# Altium PCB RAUCH_PCB.PcbDoc
Units mm, origin at the board's own origin, x right, y up, seen from the top; angles counter-clockwise.
Board outline 99.95 x 50.04 mm, 2 copper layers (Top Layer, Bottom Layer); 42 components, 26 nets, 91 pads, 10 vias.
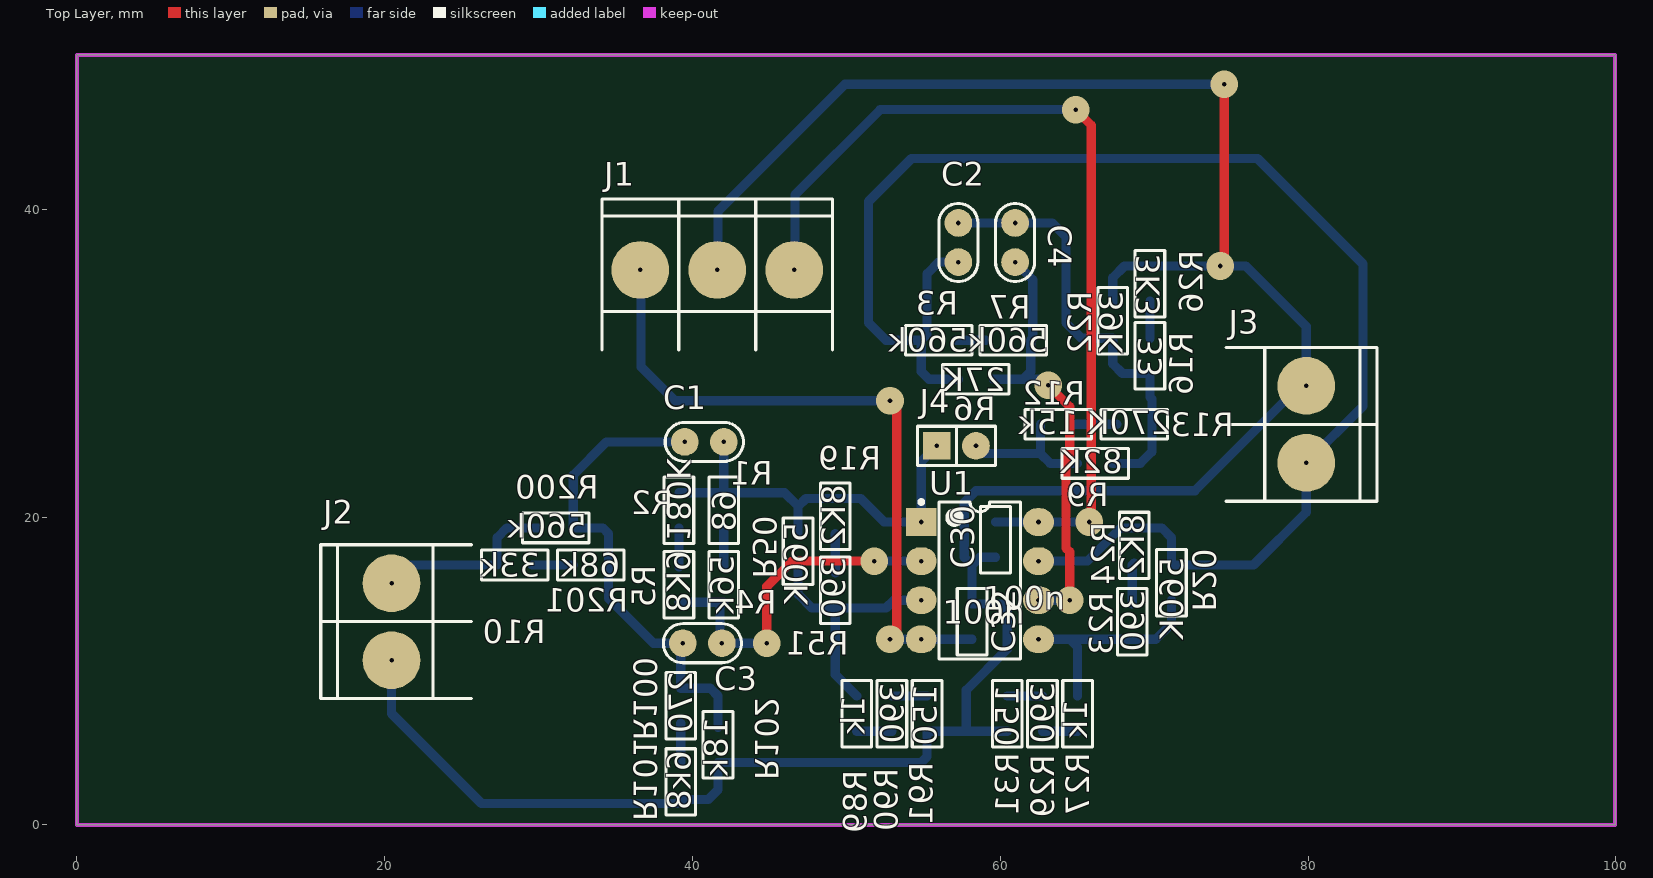
[diagram p0: Top Layer view]
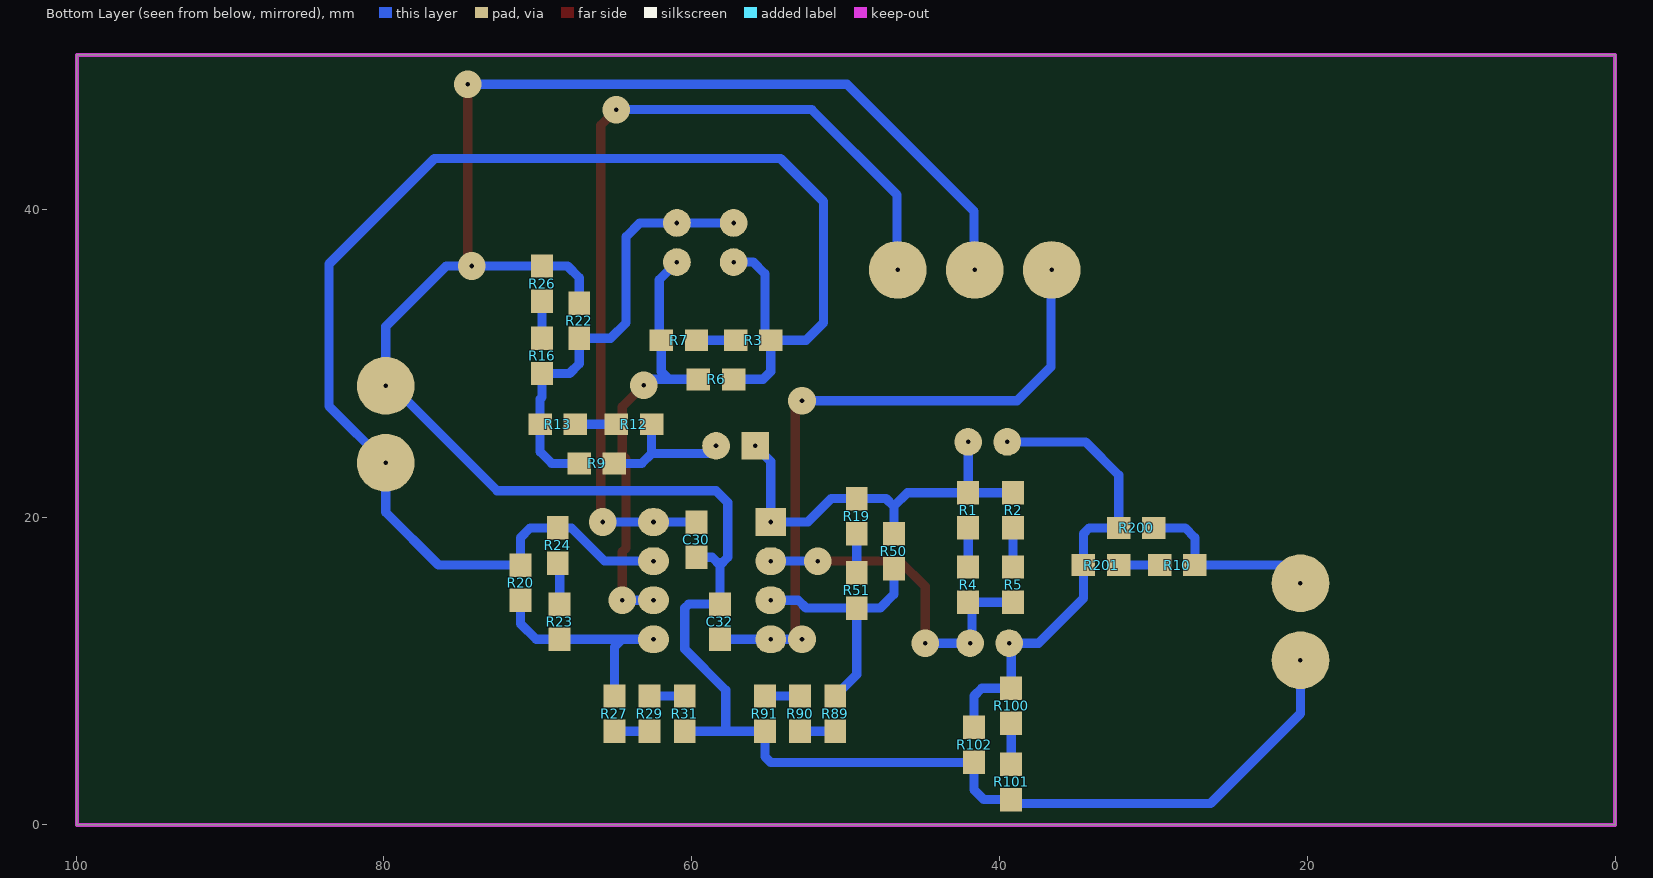
[diagram p1: Bottom Layer view, seen from below]
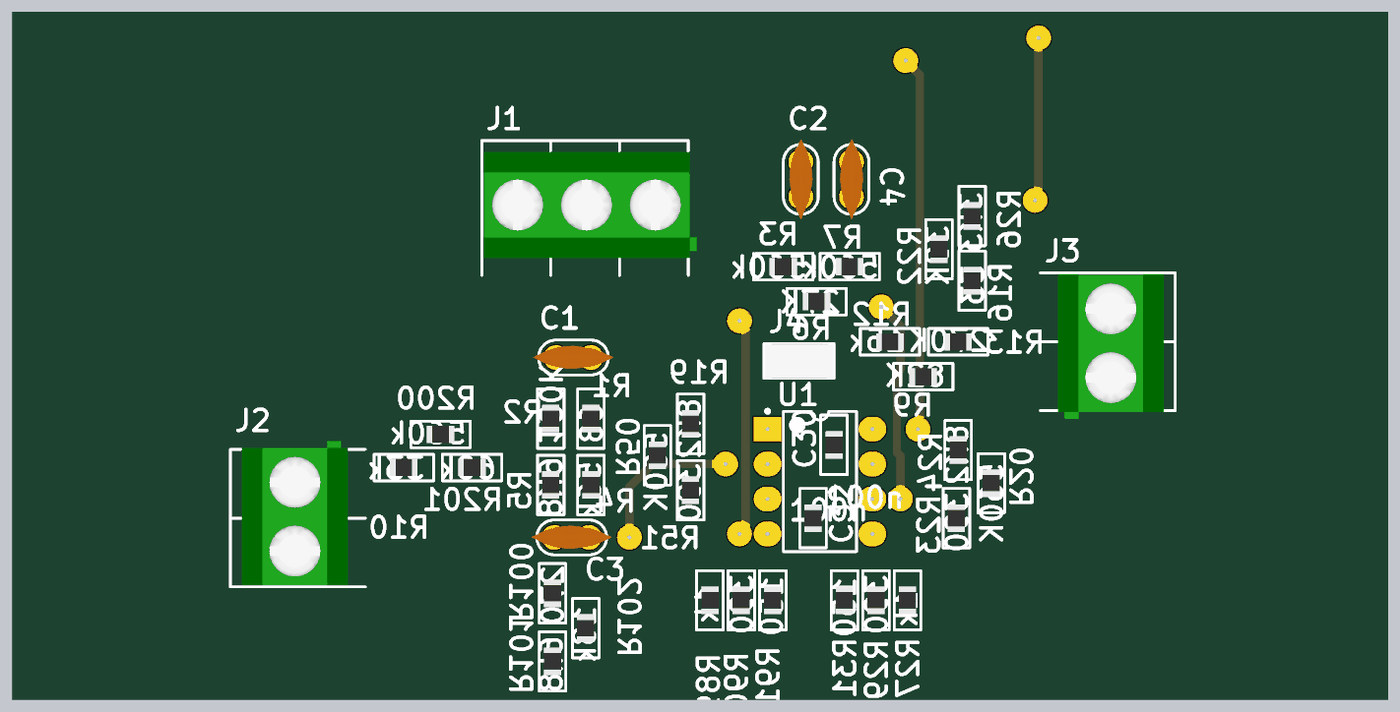
[diagram p2: 3D render of the assembled board from above, using the file's embedded part models]
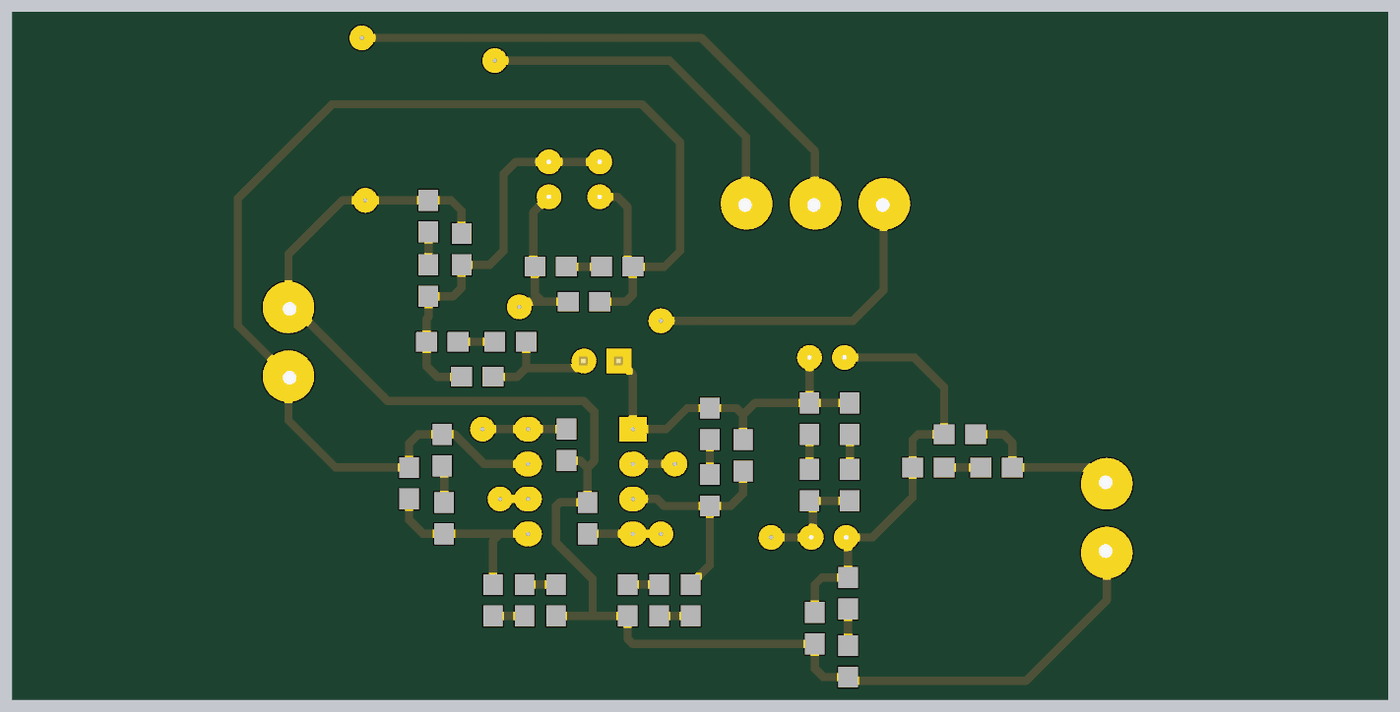
[diagram p3: 3D render of the assembled board from below, using the file's embedded part models]

## Layer stack, top to bottom
Top Solder: solder mask 0.0102, Solder Resist, Dk 3.5
Top Layer: signal copper 0.0356
Dielectric 1: dielectric 0.32, FR-4, Dk 4.8
Bottom Layer: signal copper 0.0356
Bottom Solder: solder mask 0.0102, Solder Resist, Dk 3.5

## Board outline
0,0 99.949,0 99.949,50.038 0,50.038

## Design rules (kind name [scope] priority, off if disabled: settings)
Clearance [All] p1: gap=0.254 ignorepadtopadclearanceinfootprint=FALSE except(0: Arc-Hole Track-Hole SMDPad-Hole THPad-Hole Via-Hole Fill-Hole Poly-Hole Region-Hole Text-Hole)
PolygonConnect [All] p1: connectstyle=Relief reliefconductorwidth=0.254 reliefentries=4 polygonreliefangle="90 Angle" airgapwidth=0.254
RoutingVias [All] p1: holewidth=0.711 width=1.27 viastyle="Through Hole" minholewidth=0.711 minwidth=1.27 maxholewidth=0.711 maxwidth=1.27
SolderMaskExpansion [All] p1: expansion=0.102
Width [All] p1: maxlimit=0.6 minlimit=0.6 preferedwidth=0.6
30 further rules are at their usual default settings.

## Components (designator, comment, footprint, x,y, rotation, side; value= is the part's Value field where it differs from the comment)
C1 "330p" CAP100 40.767,24.892 r0 top
C2 "470p" CAP100 57.277,37.846 r270 top
C3 "330p" CAP100 40.64,11.811 r0 top
C4 "470p" CAP100 60.96,37.846 r270 top
C30 "100n" 0805 59.69,18.542 r90 bottom
C32 "100n" 0805 58.166,13.208 r90 bottom
J1 "POWER" BORNERA3 41.609,36.068 r270 top
J2 "BORNERA 2" BORNERA2 20.447,13.208 r0 top
J3 "BORNERA 2" BORNERA2 79.883,26.035 r180 top
J4 "JUMPER" JUMPER2 57.15,24.638 r0 top
R1 "68" 0805 42.037,20.447 r90 bottom
R2 "180K" 0805 39.116,20.447 r90 bottom
R3 "560k" 0805 56.007,31.496 r0 bottom
R4 "56k" 0805 42.037,15.621 r90 bottom
R5 "6K8" 0805 39.116,15.621 r90 bottom
R6 "27K" 0805 58.42,28.956 r0 bottom
R7 "560k" 0805 60.833,31.496 r0 bottom
R9 "82K" 0805 66.167,23.495 r180 bottom
R10 "33k" 0805 28.448,16.891 r0 bottom
R12 "15k" 0805 63.754,26.035 r180 bottom
R13 "270K" 0805 68.707,26.035 r180 bottom
R16 "33" 0805 69.723,30.48 r90 bottom
R19 "8K2" 0805 49.276,20.066 r270 bottom
R20 "560K" 0805 71.12,15.748 r270 bottom
R22 "39K" 0805 67.31,32.766 r90 bottom
R23 "390" 0805 68.58,13.208 r270 bottom
R24 "8K2" 0805 68.707,18.161 r270 bottom
R26 "3K3" 0805 69.723,35.179 r90 bottom
R27 "1k" 0805 65.024,7.239 r90 bottom
R29 "390" 0805 62.738,7.239 r270 bottom
R31 "150" 0805 60.452,7.239 r90 bottom
R50 "560K" 0805 46.863,17.78 r270 bottom
R51 "390" 0805 49.276,15.24 r270 bottom
R89 "1k" 0805 50.673,7.239 r90 bottom
R90 "390" 0805 52.959,7.239 r270 bottom
R91 "150" 0805 55.245,7.239 r90 bottom
R100 "270" 0805 39.243,7.747 r90 bottom
R101 "6k8" 0805 39.243,2.794 r90 bottom
R102 "18k" 0805 41.656,5.207 r90 bottom
R200 "560k" 0805 31.115,19.304 r0 bottom
R201 "68k" 0805 33.401,16.891 r0 bottom
U1 "TL082ACPE4" TI-P8 58.674,15.875 r0 top locked

## Footprints (in the part's own frame and the unit in brackets; to place one, negate y for a bottom-side part, rotate by r counter-clockwise, add the part's x,y. Pads: shape width x height; smd on the part's side, far side on the other; paste and mask are expansions set on the pad)
0805 [mil] "Pasivo 0805"
  rect 60x56 smd: 1(-45,0) 2(45,0)
  body extent -40,-25 39,24, height 15
BORNERA2 [mm] "Bornera con Tornillos 5mm separación"
  round 3.75 hole 0.3: 1(0,2.5) 2(0,-2.5)
  silkscreen extent -4.6,-5 5.2,5, body extent -3.76,-4.89 3.94,5.61, height 10
BORNERA3 [mm] "Bornera con Tornillos 5mm separación"
  round 3.75 hole 0.3: 1(0,5) 2(0,0) 3(0,-5)
  silkscreen extent -4.6,-7.5 5.2,7.5, body extent -3.76,-7.39 3.94,8.11, height 10.05
CAP100 [mm]
  round 1.8 hole 0.3 unplated: 1(-1.27,0) 2(1.27,0)
  silkscreen extent -2.54,-1.27 2.54,1.27, body extent -2.92,-0.84 2.92,0.86, height 6.12
JUMPER2 [mm]
  rect 1.8x1.8 hole 0.3: 1(-1.27,0)
  round 1.8 hole 0.3: 2(1.27,0)
  silkscreen extent -2.54,-1.27 2.54,1.27, body extent -2.46,-1.27 2.54,1.27, height 9.5
TI-P8 [mm] "DIP, 8-Leads, Body 9.59x6.35mm, Pitch 2.54mm"
  rect 2x1.8 hole 0.3: 1(-3.81,3.81)
  oval 2x1.8 hole 0.3: 2(-3.81,1.27) 3(-3.81,-1.27) 4(-3.81,-3.81) 5(3.81,-3.81) 6(3.81,-1.27) 7(3.81,1.27) 8(3.81,3.81)
  silkscreen extent -3.93,-5.1 2.65,5.23, body extent -3.95,-5.07 3.95,5.07, height 5.08

## Part data
C1 C2 C3 C4 C30 C32: library part CAP
J1: library part "BORNERA 3"
R1 R2 R3 R4 R5 R6 R7 R9 R10 R12 R13 R16 R19 R20 R22 R23 R24 R26 R27 R29 R31 R50 R51 R89 R90 R91 R100 R101 R102 R200 R201: library part RES
U1: "JFET-Input Operational Amplifier, 7 to 36 V, 0 to 70 degC, 8-pin DIP (P8), Pb-Free (RoHS)", Manufacturer="Texas Instruments", Rating=Catalog, Supplier Part Number 1=TL082ACPE4-ND, Total Supply Voltage(Max)(+5V is 5, +/-5V is 10)=36, Total Supply Voltage(Min)(+5V is 5, +/-5V is 10)=7, CMRR(Min)(dB)=75, Code_JEDEC=MS-001, ComponentLink1Description="Manufacturer URL", ComponentLink1URL=http://www.ti.com/, ComponentLink2Description=Datasheet, ComponentLink2URL=http://www.ti.com/lit/ds/symlink/tl082a.pdf, ComponentLink3Description="Package Specification", ComponentLink3URL=http://www.ti.com/litv/pdf/mpdi001b, DatasheetVersion=SLOS081G, Eco-Plan="Pb-Free (RoHS)", GBW(Typ)(MHz)=3, IIB(Max)(pA)=200, Iq per channel(Max)(mA)=2.8, Mounting Technology="Through Hole", Number of Channels=2, Offset Drift(Typ)(uV/C)=18, PackageDescription="8-Pin Plastic In-Line, Body 9.59 x 6.35 mm, Pitch 2.54 mm", PackageReference=P8, PackageVersion="4040082/E, 04/2010", PartNumber=TL082ACPE4, Slew Rate(Typ)(V/us)=13, Sub Family="General Purpose Amplifier, High Supply Voltage Amplifier (>=30V)", Supplier 1=Digi-Key, Supplier 2=Newark, Supplier 3=Mouser, Supplier Part Number 2=37K4392, Supplier Part Number 3=595-TL082ACPE4, Vio (25C)(Max)(mV)=6, Vn at 1kHz(Typ)(nV/rtHz)=18

## Via types
v1: diameter 1.8, hole 0.3, Top Layer to Bottom Layer, 10 vias

## Nets (pads, with @x,y where several pads share a name; then routed paths per layer and width w, separated by ;. In a path a pad name is that pad's centre, name@x,y a point inside that pad or via, vN(x,y) a via of type N, cw(c..) or ccw(c..) an arc to the next point about the centre after c; other vN are vias at no path point)
+VCC: C30.2 J1.1 U1.8 | length 57.8
  Top Layer w0.6: v1(64.897,46.482) 65.913,45.466 v1@65.913,19.685
  Bottom Layer w0.6: J1.1@46.656,36.957 46.656,40.941 52.197,46.482 v1(64.897,46.482) ; C30.2 U1.8 v1(65.786,19.685)
-VCC: C32.1 J1.3 U1.4 | length 45.5
  Top Layer w0.6: v1(52.832,12.065) 53.27,12.503 53.27,27.121 v1(52.832,27.559)
  Bottom Layer w0.6: J1.3@36.656,36.957 36.656,29.765 38.862,27.559 v1(52.832,27.559) ; v1(52.832,12.065) U1.4 C32.1
GND: C30.1 C32.2 J1.2 J2.2 J3.2 R22.2 R26.2 R31.1 R91.1 R101.1 R102.1 | length 166.4
  Top Layer w0.6: v1(74.295,36.322) 74.549,36.576 v1(74.549,48.133)
  Bottom Layer w0.6: J2.2 20.447,7.239 26.289,1.397 38.989,1.397 R101.1 41.021,1.651 41.656,2.286 R102.1 54.864,4.064 55.245,4.445 R91.1 57.785,6.096 ; J1.2@41.656,36.957 41.656,39.878 49.911,48.133 v1(74.549,48.133) ; C30.1 58.674,17.399 58.166,16.891 ; R31.1 57.785,6.096 ; R22.2 67.31,35.56 68.072,36.322 R26.2 v1(74.295,36.322) 75.946,36.322 79.883,32.385 J3.2 79.462,28.535 72.644,21.717 58.42,21.717 57.658,20.955 57.658,17.399 58.166,16.891 ; 57.785,6.096 57.785,8.763 60.452,11.43 60.452,14.097 60.198,14.351 C32.2 58.166,16.891
NetC1_1: C1.1 C3.1 R100.2 R102.2 R200.2 R201.2 | length 31.7
  Bottom Layer w0.6: C1.1 34.417,24.892 32.258,22.733 R200.2 34.163,19.304 34.544,18.923 R201.2 34.544,14.732 37.465,11.811 39.243,11.811 R100.2 41.148,8.89 41.656,8.382 R102.2
NetC2_1: C2.1 C4.1 R9.1 R13.1 R16.1 R22.1 | length 28.7
  Bottom Layer w0.6: C2.1 C4.1 63.373,39.116 64.262,38.227 64.262,32.639 65.278,31.623 R22.1 67.31,29.972 67.945,29.337 R16.1 69.723,27.813 69.85,27.686 R13.1 69.85,24.257 69.088,23.495 R9.1
NetC3_2: C3.2 R4.1 R5.1 U1.2 | length 23.1
  Top Layer w0.6: v1(44.831,11.811) 44.831,15.494 46.482,17.145 v1(51.816,17.145)
  Bottom Layer w0.6: R5.1 R4.1 41.783,14.224 41.783,11.811 C3.2 v1(44.831,11.811) ; v1(51.816,17.145) U1.2
NetC4_2: C4.2 R6.2 R7.2 U1.6 | length 28.5
  Top Layer w0.6: v1(63.119,28.575) 64.516,27.178 64.516,24.035 64.262,23.781 64.262,18.002 64.516,17.748 v1(64.516,14.605)
  Bottom Layer w0.6: R6.2 61.468,28.956 ; C4.2 62.103,35.433 62.103,31.623 R7.2 61.976,29.464 61.468,28.956 ; U1.6 v1@64.135,14.605 ; v1(63.119,28.575) 62.738,28.956 61.468,28.956
NetJ4_2: J4.2 R9.2 R12.2 | length 9
  Bottom Layer w0.6: J4.2 58.928,24.13 62.611,24.13 ; R12.2 62.611,24.13 ; R9.2 63.246,23.495 62.611,24.13
NetR1_1: R1.1 R4.2 | length 2.5
  Bottom Layer w0.6: R4.2 R1.1
NetR2_1: R2.1 R5.2 | length 2.5
  Bottom Layer w0.6: R5.2 R2.1
NetR3_2: R3.2 R7.1 | length 1.9
  Bottom Layer w0.6: R3.2 R7.1@59.055,31.496
NetR10_2: R10.2 R201.1 | length 2.7
  Bottom Layer w0.6: R10.2 R201.1
NetR12_1: R12.1 R13.2 | length 2.7
  Bottom Layer w0.6: R12.1 R13.2
NetR16_2: R16.2 R26.1 | length 2.4
  Bottom Layer w0.6: R16.2 R26.1
NetR19_2: R19.2 R51.1 | length 2.5
  Bottom Layer w0.6: R51.1 R19.2
NetR20_2: R20.2 R23.2 R27.2 U1.5 | length 14.5
  Bottom Layer w0.6: U1.5 64.516,12.065 ; R27.2 65.024,11.557 64.516,12.065 ; R20.2 71.12,13.081 70.104,12.065 R23.2 64.516,12.065
NetR23_1: R23.1 R24.2 | length 2.7
  Bottom Layer w0.6: R23.1 68.58,16.891 R24.2
NetR27_1: R27.1 R29.2 | length 2.3
  Bottom Layer w0.6: R29.2 R27.1
NetR29_1: R29.1 R31.2 | length 2.3
  Bottom Layer w0.6: R31.2 R29.1
NetR50_2: R50.2 R51.2 R89.2 U1.3 | length 16.5
  Bottom Layer w0.6: R50.2 46.863,14.986 47.752,14.097 R51.2 ; R89.2 49.276,9.779 R51.2 ; U1.3 53.086,14.605 52.578,14.097 R51.2
NetR89_1: R89.1 R90.2 | length 2.3
  Bottom Layer w0.6: R89.1 R90.2
NetR90_1: R90.1 R91.2 | length 2.3
  Bottom Layer w0.6: R90.1 R91.2
NetR100_1: R100.1 R101.2 | length 2.7
  Bottom Layer w0.6: R101.2 R100.1
OUT1: C1.2 J4.1 R1.2 R2.2 R19.1 R50.1 U1.1 | length 27.4
  Bottom Layer w0.6: R2.2 R1.2 ; C1.2 R1.2 ; R50.1 46.863,20.701 ; J4.1 54.864,23.622 U1.1 52.451,19.685 50.927,21.209 R19.1 47.371,21.209 46.863,20.701 ; R1.2 45.974,21.59 46.863,20.701
VIN: J2.1 R10.1 R200.1 | length 12.1
  Bottom Layer w0.6: J2.1 21.63,16.891 R10.1 27.305,18.669 27.94,19.304 R200.1
VOUT: C2.2 J3.1 R3.1 R6.1 R20.1 R24.1 U1.7 | length 98.8
  Bottom Layer w0.6: R6.1 55.372,28.956 54.864,29.464 R3.1 ; C2.2 56.007,36.576 55.245,35.814 55.245,31.877 R3.1 ; U1.7 65.659,17.145 67.818,19.304 R24.1 70.485,19.304 71.12,18.669 R20.1 76.454,16.891 79.883,20.32 J3.1 83.566,27.218 83.566,36.449 76.708,43.307 54.229,43.307 51.435,40.513 51.435,32.639 52.578,31.496 R3.1

## Keep-outs
Keep-Out Layer:
  the board outline again, w0.254